# Altium PCB PCB1.PcbDoc (part 1 of 2)
Units mil, origin at the board's own origin, x right, y up, seen from the top; angles counter-clockwise.
Board outline 3035 x 2265 mil, 2 copper layers (Top Layer, Bottom Layer); 66 components, 70 nets, 274 pads, 24 vias.
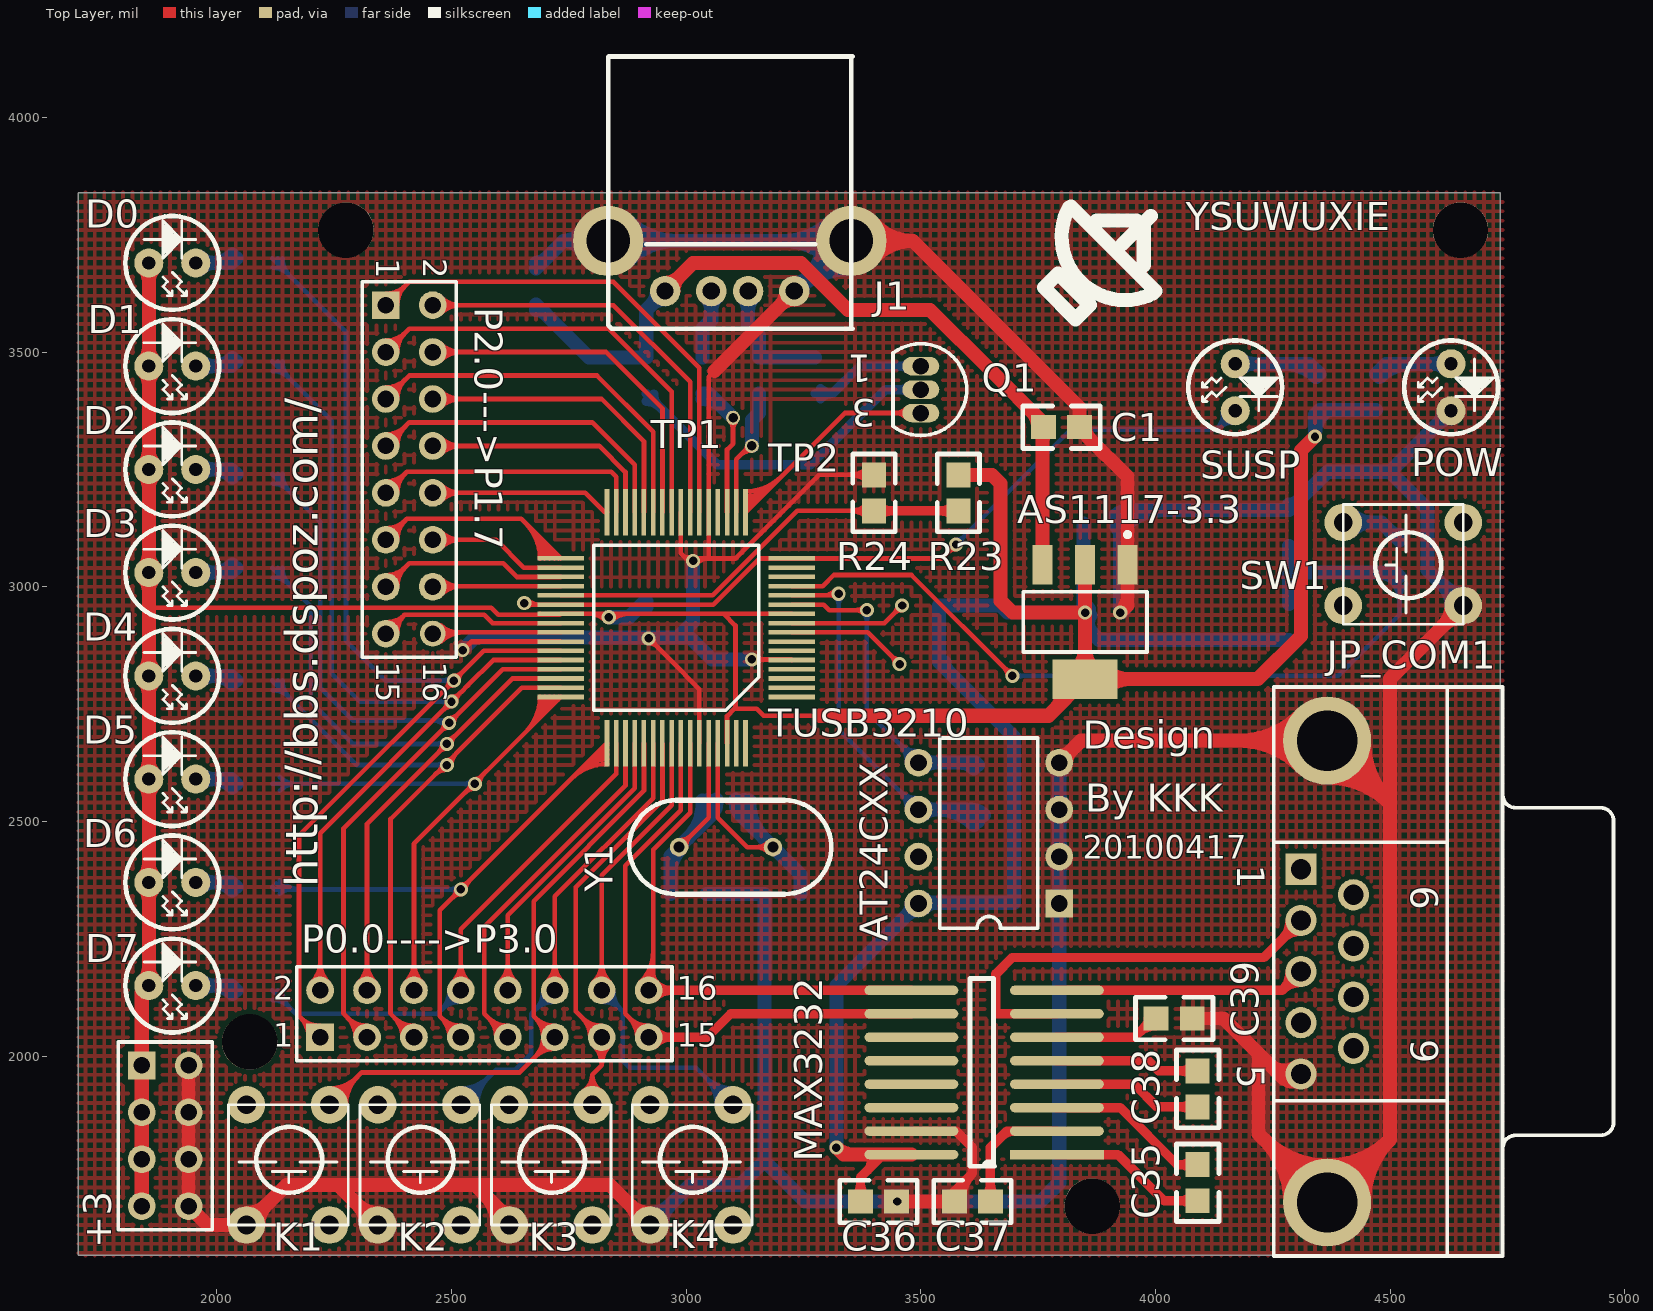
[diagram p0: Top Layer view]
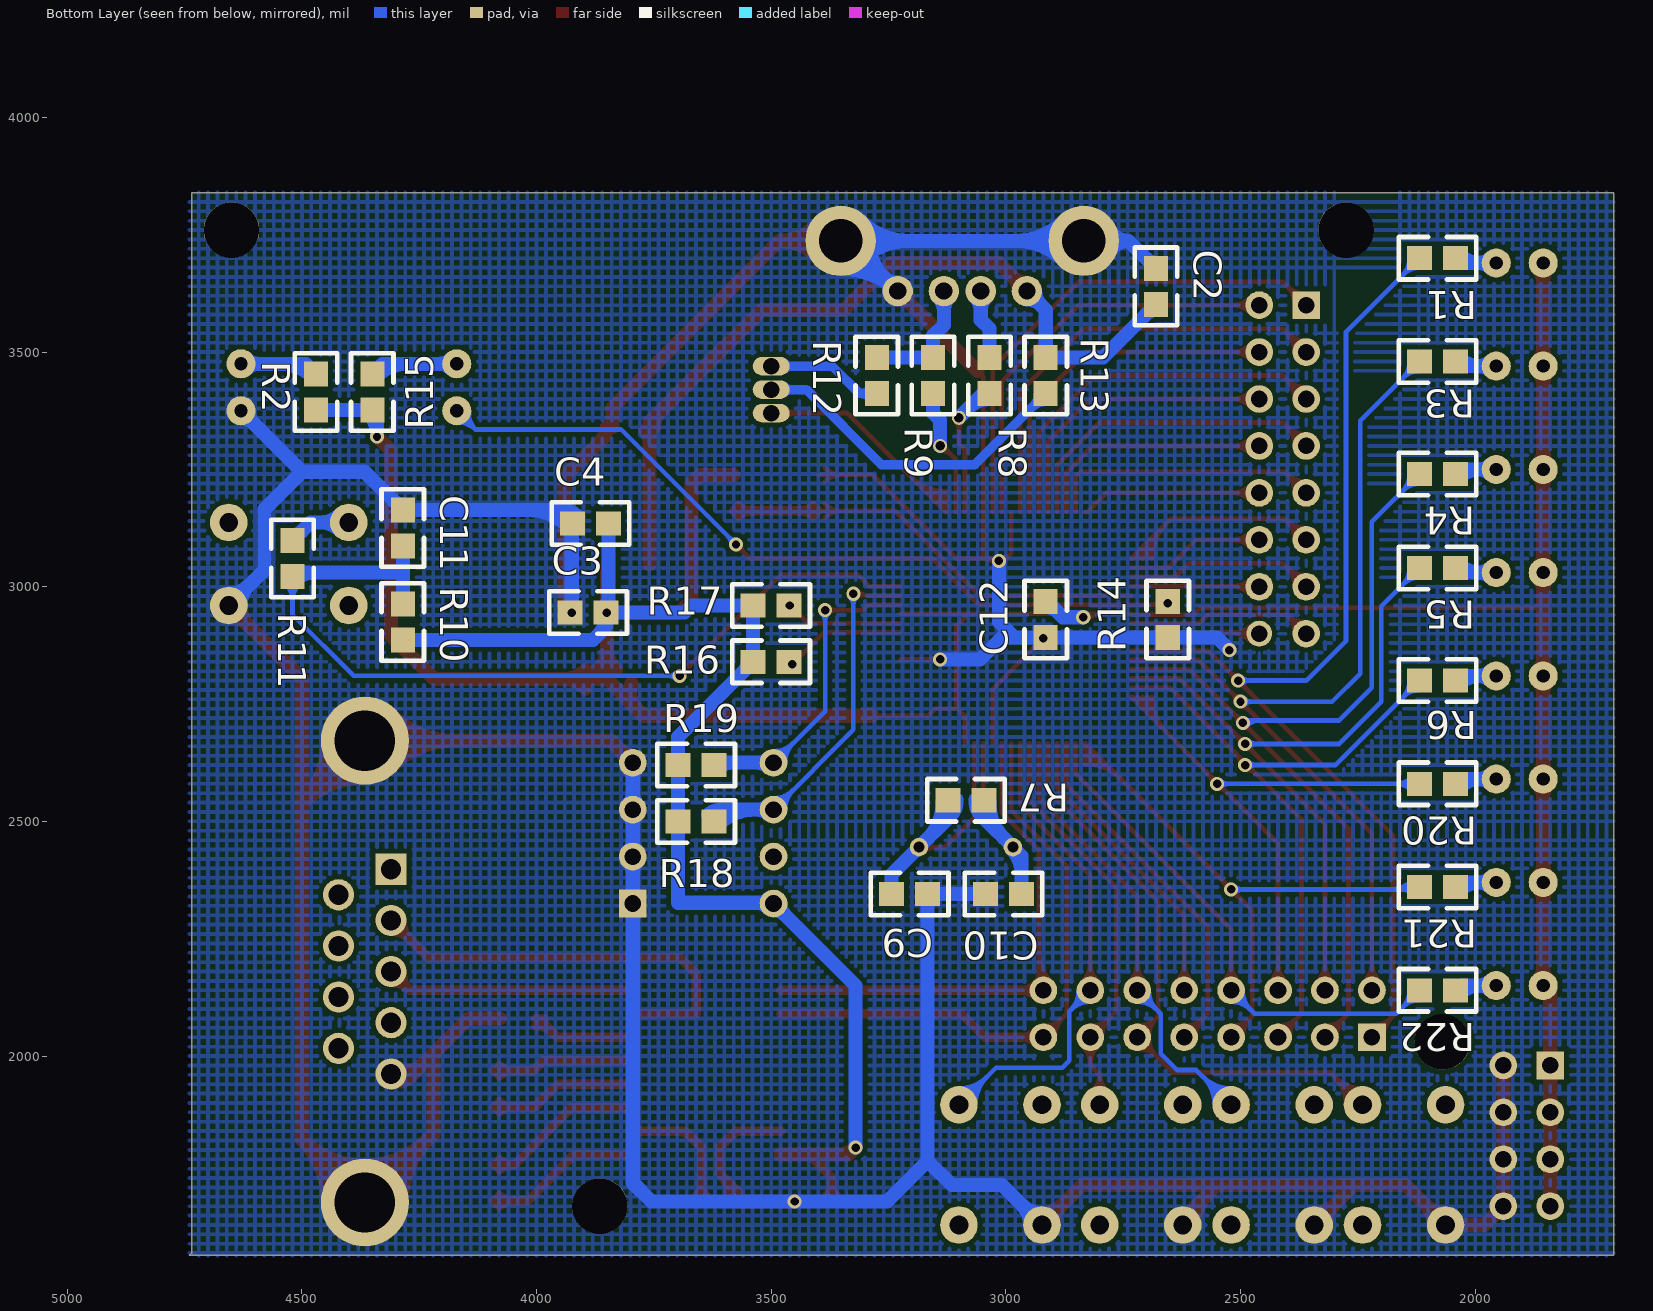
[diagram p1: Bottom Layer view, seen from below]

## Layer stack, top to bottom
Top Layer: signal copper 1.4
Dielectric: dielectric 12.6, FR-4, Dk 4.8
Bottom Layer: signal copper 1.4

## Board outline
1705,3840 1705,1575 4740,1575 4735,1580 4735,3840

## Design rules (kind name [scope] priority, off if disabled: settings)
Clearance [All] p1: gap=5
HoleSize [All] p1: absolutevalues=TRUE maxlimit=300 minlimit=1 maxpercent=80.000 minpercent=20.000
PolygonConnect [All] p1: connectstyle=Direct reliefconductorwidth=10 reliefentries=4 polygonreliefangle="90 Angle"
RoutingVias [All] p1: holewidth=18 width=30 viastyle="Through Hole" minholewidth=18 minwidth=30 maxholewidth=18 maxwidth=30
SilkscreenOverComponentPads [All] p1: minsilkscreentomaskgap=10
SolderMaskExpansion [All] p1: expansion=4
TestPointUsage [All] p1: valid=0 allowmultiple=FALSE
Testpoint [All] p1: side=15 testpointundercomponent=TRUE minsize=40 maxsize=100 preferedsize=60 minholesize=0 maxholesize=40 preferedholesize=32 testpointgrid=1 style=1023 order=0123456789
Width [All] p1: maxlimit=50 minlimit=5 preferedwidth=50
22 further rules are at their usual default settings.

## Components (designator, comment, footprint, x,y, rotation, side; value= is the part's Value field where it differs from the comment)
+3 "Header 4X2" HDR2X4 1840,1980 r270 top (schematic designator "+3.3  GND")
AS1117-3.3 "AS1117-3.3" DSO-G3 3850,2925 r180 top
AT24CXX "24LCxx" DIP-8 3645,2475 r90 top (schematic designator U5)
C1 "Cap" C0805 3800,3340 r180 top
C2 "Cap" C0805 2680,3640 r270 bottom
C3 "Cap" C0805 3890,2945 r180 bottom
C4 "Cap" C0805 3885,3135 r180 bottom
C9 "Cap" C0805 3205,2345 r180 bottom
C10 "Cap" C0805 3005,2345 r0 bottom
C11 "Cap" C0805 4285,3125 r90 bottom
C12 "Cap" C0805 2915,2930 r90 bottom
C35 "Cap" C0805 4090,1730 r90 top
C36 "Cap" C0805 3410,1690 r0 top
C37 "Cap" C0805 3610,1690 r0 top
C38 "Cap" C0805 4090,1930 r90 top
C39 "Cap" C0805 4040,2080 r180 top
D0 "LED1" LED 1855,3690 r0 top
D1 "LED1" LED 1855,3470 r0 top
D2 "LED1" LED 1855,3250 r0 top
D3 "LED1" LED 1855,3030 r0 top
D4 "LED1" LED 1855,2810 r0 top
D5 "LED1" LED 1855,2590 r0 top
D6 "LED1" LED 1855,2370 r0 top
D7 "LED1" LED 1855,2150 r0 top
J1 "USB_A" USB-A 2955,3630 r180 top
JP_COM1 "D Connector 9" DSUB1.385-2H9 4740,2180 r270 top
K1 "Button" SW-6 2240,1640 r90 top
K2 "Button" SW-6 2520,1640 r90 top
K3 "Button" SW-6 2800,1640 r90 top
K4 "Button" SW-6 3100,1640 r90 top
MAX3232 "MAX3232" SOP16 3770,1790 r180 top (schematic designator U6)
P0.0---->P3.0 "Header 8X2" HDR2X8#1 2220,2040 r0 top (schematic designator P1)
P2.0--->P1.7 "Header 8X2" HDR2X8#2 2360,3600 r270 top (schematic designator P2)
POW "LED1" LED 4630,3475 r270 top
Q1 "2N3904" TO-92A 3500,3420 r180 top
R1 "Res2" c0805 2080,3700 r180 bottom
R2 "Res2" c0805 4470,3415 r90 bottom
R3 "Res2" c0805 2080,3480 r180 bottom
R4 "Res2" c0805 2080,3240 r180 bottom
R5 "Res2" c0805 2080,3040 r180 bottom
R6 "Res2" c0805 2080,2800 r180 bottom
R7 "Res2" c0805 3085,2545 r180 bottom
R8 "Res2" c0805 3035,3450 r270 bottom
R9 "Res2" c0805 3155,3450 r270 bottom
R10 "Res2" c0805 4285,2925 r270 bottom
R11 "Res2" c0805 4520,3060 r270 bottom
R12 "Res2" c0805 3275,3450 r90 bottom
R13 "Res2" c0805 2915,3450 r90 bottom
R14 "Res2" c0805 2655,2930 r270 bottom
R15 "Res2" c0805 4350,3415 r90 bottom
R16 "Res2" c0805 3500,2840 r180 bottom
R17 "Res2" c0805 3500,2960 r180 bottom
R18 "Res2" c0805 3660,2500 r0 bottom
R19 "Res2" c0805 3660,2620 r0 bottom
R20 "Res2" c0805 2080,2580 r180 bottom
R21 "Res2" c0805 2080,2360 r180 bottom
R22 "Res2" c0805 2080,2140 r180 bottom
R23 "Res2" c0805 3580,3200 r90 top
R24 "Res2" c0805 3400,3200 r270 top
SUSP "LED1" LED 4170,3475 r270 top
SW1 "Button" SW-6 4400,2960 r0 top
TP1 "TestPoint" TESTPOINT 3100,3360 r90 top
TP2 "TestPoint" TESTPOINT 3140,3300 r90 top
TUSB3210 "TUSB3210" Quad64 3225,2765 r180 top (schematic designator U3)
Y1 "XTAL" GJA-M 3085,2445 r180 top
? "Comment" WXDAHZ 3880,3680 r0 top

## Footprints (in the part's own frame and the unit in brackets; to place one, negate y for a bottom-side part, rotate by r counter-clockwise, add the part's x,y. Pads: shape width x height; smd on the part's side, far side on the other; paste and mask are expansions set on the pad)
C0805 [mm]
  rect 1.35x1.3 smd: 1(-0.975,0) 2(0.975,0)
  silkscreen extent -2.1,-1.15 2.1,1.15
c0805 [mm]
  rect 1.35x1.3 smd: 1(-0.975,0) 2(0.975,0)
  silkscreen extent -2.1,-1.15 2.1,1.15
DIP-8 [mm] "DIP; 8 Leads; Row Spacing 7.62 mm; Pitch 2.54 mm"
  rect 1.5x1.5 hole 0.9: 1(-3.81,-3.81)
  round 1.5 hole 0.9: 2(-1.27,-3.81) 3(1.27,-3.81) 4(3.81,-3.81) 5(3.81,3.81) 6(1.27,3.81) 7(-1.27,3.81) 8(-3.81,3.81)
  silkscreen extent -5.15,-2.65 5.15,2.65
DSO-G3 [mm]
  rect 1.1x2.15 smd: 1(-2.3,-3.1) 2(0,-3.1) 3(2.3,-3.1)
  rect 3.5x2.15 smd: 4(0,3.1)
  silkscreen extent -3.35,-4.85 3.35,1.63
DSUB1.385-2H9 [mm] "Connector; D Subminiature; 9 Position; Right Angle; Pitch 1.385 mm"
  rect 1.69x1.69 hole 1.09: 1(-5.54,-10.92)
  round 1.69 hole 1.09: 2(-2.77,-10.92) 3(0,-10.92) 4(2.77,-10.92) 5(5.54,-10.92) 6(-4.155,-8.08) 7(-1.385,-8.08) 8(1.385,-8.08) 9(4.155,-8.08)
  round 4.76 hole 3.26: 10(-12.495,-9.5) 11(12.495,-9.5)
  silkscreen extent -15.4,-12.4 15.4,6
GJA-M [mm]
  round 1 hole 0.6: 1(-2.54,0) 2(2.54,0)
  silkscreen extent -5.69,-2.54 5.23,2.54
HDR2X4 [mm] "Connector; Header; 4x2 Position"
  rect 1.5x1.5 hole 0.9: 1(0,0)
  round 1.5 hole 0.9: 2(0,2.54) 3(2.54,0) 4(2.54,2.54) 5(5.08,0) 6(5.08,2.54) 7(7.62,0) 8(7.62,2.54)
  silkscreen extent -1.27,-1.27 8.89,3.81
HDR2X8#1 [mm] "Connector; Header; 8x2 Position"
  rect 1.5x1.5 hole 0.9: 1(0,0)
  round 1.5 hole 0.9: 2(0,2.54) 3(2.54,0) 4(2.54,2.54) 5(5.08,0) 6(5.08,2.54) 7(7.62,0) 8(7.62,2.54) 9(10.16,0) 10(10.16,2.54) 11(12.7,0) 12(12.7,2.54) 13(15.24,0) 14(15.24,2.54) 15(17.78,0) 16(17.78,2.54)
  silkscreen extent -1.27,-1.27 19.05,3.81
HDR2X8#2 [mm] "Connector; Header; 8x2 Position"
  rect 1.5x1.5 hole 0.9: 1(0,0)
  round 1.5 hole 0.9: 2(0,2.54) 3(2.54,0) 4(2.54,2.54) 5(5.08,0) 6(5.08,2.54) 7(7.62,0) 8(7.62,2.54) 9(10.16,0) 10(10.16,2.54) 11(12.7,0) 12(12.7,2.54) 13(15.24,0) 14(15.24,2.54) 15(17.78,0)
  round 1.397 hole 0.9: 16(17.78,2.54)
  silkscreen extent -1.27,-1.27 19.05,3.81
LED [mil]
  round 62 hole 28: 1(0,0) 2(100,0)
  silkscreen extent -50,-100 150,100
Quad64 [mm]
  rect 2.5x0.25 smd: 1(0,0) 2(0,-0.5) 3(0,-1) 4(0,-1.5) 5(0,-2) 6(0,-2.5) 7(0,-3) 8(0,-3.5) 9(0,-4) 10(0,-4.5) 11(0,-5) 12(0,-5.5) 13(0,-6) 14(0,-6.5) 15(0,-7) 16(0,-7.5) 33(12.5,-7.5) 34(12.5,-7) 35(12.5,-6.5) 36(12.5,-6) 37(12.5,-5.5) 38(12.5,-5) 39(12.5,-4.5) 40(12.5,-4) 41(12.5,-3.5) 42(12.5,-3) 43(12.5,-2.5) 44(12.5,-2) 45(12.5,-1.5) 46(12.5,-1) 47(12.5,-0.5) 48(12.5,0)
  rect 0.25x2.5 smd: 17(2.5,-10) 18(3,-10) 19(3.5,-10) 20(4,-10) 21(4.5,-10) 22(5,-10) 23(5.5,-10) 24(6,-10) 25(6.5,-10) 26(7,-10) 27(7.5,-10) 28(8,-10) 29(8.5,-10) 30(9,-10) 31(9.5,-10) 32(10,-10) 49(10,2.5) 50(9.5,2.5) 51(9,2.5) 52(8.5,2.5) 53(8,2.5) 54(7.5,2.5) 55(7,2.5) 56(6.5,2.5) 57(6,2.5) 58(5.5,2.5) 59(5,2.5) 60(4.5,2.5) 61(4,2.5) 62(3.5,2.5) 63(3,2.5) 64(2.5,2.5)
  silkscreen extent 1.79,-8.21 10.71,0.71
SOP16 [mil]
  rect 200x20 smd: 1(-20,0)
  oval 200x20 smd: 2(-20,-50) 3(-20,-100) 4(-20,-150) 5(-20,-200) 6(-20,-250) 7(-20,-300) 8(-20,-350) 9(290,-350) 10(290,-300) 11(290,-250) 12(290,-200) 13(290,-150) 14(290,-100) 15(290,-50) 16(290,0)
  silkscreen extent 112,-375 165,25
SW-6 [mil]
  round 80 hole 40: 1(0,0) 2(0,177) 3(256,0) 4(256,177)
  silkscreen extent 0,-40 256,215
TESTPOINT [mil]
  round 30 hole 20: 1(0,0)
TO-92A [mm] "TO, Flat Index; 3 In-Line, Axial Leads; Body Dia. 4.5mm; Leads 0.51 x 0.48 mm (max)"
  oval 2x1 hole 0.9: 1(0,-1.27) 2(0,0) 3(0,1.27)
  silkscreen extent -2.48,-2.48 1.5,2.48
USB-A [mil]
  round 65 hole 37: 1(0,0) 2(-98.5,0) 3(-177,0) 4(-275.6,0)
  round 150 hole 93: 5(121,-107) 6(-397,-107)
  silkscreen extent -400,-500 121,80
WXDAHZ [mil]
  silkscreen extent -118,-110 120,130

## Part data
+3: "Header, 4-Pin, Dual row"
C1 C2 C3 C4 C9 C10 C11 C12 C35 C36 C37 C38 C39: "Capacitor"
D0 D1 D2 D3 D4 D5 D6 D7 POW SUSP: "Typical RED GaAs LED"
JP_COM1: "Receptacle Assembly, 9 Position, Right Angle"
K1 K2 K3 K4 SW1: library part Button_4
P0.0---->P3.0 P2.0--->P1.7: "Header, 8-Pin, Dual row"
Q1: "NPN General Purpose Amplifier"
R1 R2 R3 R4 R5 R6 R7 R8 R9 R10 R11 R12 R13 R14 R15 R16 R17 R18 R19 R20 R21 R22 R23 R24: "Resistor"
TP1 TP2: "TespPoint"
Y1: "Crystal Oscillator"

## Free pads (board coordinates)
  round 118.11 hole 118.11: 0(2070,2030) 0(3865,1680) 1(4650,3760) 2(2275,3760)

## Via types
v1: diameter 30, hole 18, Top Layer to Bottom Layer, 24 vias

## Nets (pads, with @x,y where several pads share a name; then routed paths per layer and width w, separated by ;. In a path a pad name is that pad's centre, name@x,y a point inside that pad or via, vN(x,y) a via of type N, cw(c..) or ccw(c..) an arc to the next point about the centre after c; other vN are vias at no path point)
+1.8: R23.1 R24.2 TUSB3210.37 | length 1118
  Top Layer w10: TUSB3210.37@2732.87,2981.53 3056.53,2981.53 3236.61,3161.61 R24.2@3400,3161.61 ; R24.2@3385.44,3147.05 ccw(c3350.29,3111.9) 3350.29,3161.61 ccw(c3350.29,3211.32) R24.2@3385.44,3176.17
  Top Layer w20: R24.2@3400,3161.61 R23.1@3580,3161.61 ; R24.2@3411.02,3150.59 cw(c3437.64,3123.98) 3437.64,3161.61 cw(c3437.64,3199.25) R24.2@3411.02,3172.64 ; R23.1@3568.98,3150.59 ccw(c3542.36,3123.98) 3542.36,3161.61 ccw(c3542.36,3199.25) R23.1@3568.98,3172.64
+3.3: +3.1 +3.3 +3.5 +3.7 AS1117-3.3.2 AS1117-3.3.4 AT24CXX.8 C3.2 C4.2 C12.2 C36.1 D0.1 D1.1 D2.1 D3.1 D4.1 D5.1 D6.1 D7.1 MAX3232.16 R2.1 R10.2 R15.1 R16.1 R17.1 R18.2 R19.2 R23.2 TUSB3210.10 TUSB3210.39 TUSB3210.62 | length 12761.5
  Top Layer w10: 1855,2955 2585,2955 2600,2940 2730.71,2940 TUSB3210.39@2732.87,2942.16 3080,2942.16 ; 2683.55,2940 ccw(c2683.55,2947.2) TUSB3210.39@2688.64,2942.11 ; 2793.56,2942.16 cw(c2793.56,2893.56) v1@2827.93,2927.93 ; 2817.7,2942.16 cw(c2817.7,2917.7) v1(2835,2935) cw(c2852.3,2917.7) 2852.3,2942.16 ; v1@2842.07,2927.93 cw(c2876.44,2893.56) 2876.44,2942.16 ; TUSB3210.62@3087.2,2666.57 3087.2,2724.41 3102.8,2740 3105,2740 ; TUSB3210.10@3225,2942.16 3080,2942.16 ; 3285,2725 3165,2725 3150,2740 3105,2740 ; 3080,2942.16 3105,2917.16 3105,2740
  Top Layer w20: C36.1@3371.61,1690 3371.61,1741.61 3420,1790 MAX3232.16@3480,1790 ; 3371.61,1727.64 cw(c3333.98,1727.64) 3360.59,1701.02 ccw(c3333.98,1727.64) 3371.61,1727.64 ; 3371.61,1727.64 ccw(c3409.25,1727.64) 3382.64,1701.02 cw(c3409.25,1727.64) 3371.61,1727.64 ; 3386.61,1756.61 ccw(c3367.85,1775.38) 3390,1790 cw(c3367.85,1775.38) 3386.61,1756.61
  Top Layer w30: +3.7@1840,1680 +3.5@1840,1780 +3.3@1840,1880 +3.1@1840,1980 1840,2135 D7.1@1855,2150 D6.1@1855,2370 D5.1@1855,2590 D4.1@1855,2810 1855,2955 D3.1@1855,3030 D2.1@1855,3250 D1.1@1855,3470 D0.1@1855,3690 ; 3285,2725 3772.05,2725 AS1117-3.3.4@3850,2802.95 ; 3356.21,1790 cw(c3356.21,1841.21) v1(3320,1805) 3335,1790 MAX3232.16@3480,1790 ; R23.2@3580,3238.39 3651.61,3238.39 3670,3220 3670,2970 3695,2945 v1(3850,2945) ; 3785.34,2738.29 ccw(c3747.88,2775.75) AS1117-3.3.4@3797.72,2793.7 ; AS1117-3.3.4@3830.68,2822.27 ccw(c3784.04,2868.92) 3850,2868.92 ccw(c3915.96,2868.92) AS1117-3.3.4@3869.32,2822.27 ; AS1117-3.3.2@3850,3047.05 v1(3850,2945) ; AS1117-3.3.4@3895.89,2783.63 cw(c3942.54,2736.99) 3942.54,2802.95 cw(c3942.54,2868.92) AS1117-3.3.4@3895.89,2822.27 ; v1(4340,3320) 4310,3290 4310,2895 4217.95,2802.95 AS1117-3.3.4@3850,2802.95 ; D7.1@1843.69,2161.31 ccw(c1816.37,2188.63) 1855,2188.63 ; D7.1@1843.69,2161.31 ccw(c1816.37,2188.63) 1855,2188.63 ; D7.1@1843.69,2161.31 ccw(c1816.37,2188.63) 1855,2188.63 ; D6.1@1843.69,2358.69 cw(c1816.37,2331.37) 1855,2331.37 ; D6.1@1843.69,2358.69 cw(c1816.37,2331.37) 1855,2331.37 ; D6.1@1843.69,2358.69 cw(c1816.37,2331.37) 1855,2331.37 ; D6.1@1843.69,2381.31 ccw(c1816.37,2408.63) 1855,2408.63 ; D6.1@1843.69,2381.31 ccw(c1816.37,2408.63) 1855,2408.63 ; D6.1@1843.69,2381.31 ccw(c1816.37,2408.63) 1855,2408.63 ; D5.1@1843.69,2578.69 cw(c1816.37,2551.37) 1855,2551.37 ; D5.1@1843.69,2578.69 cw(c1816.37,2551.37) 1855,2551.37 ; D5.1@1843.69,2578.69 cw(c1816.37,2551.37) 1855,2551.37 ; D5.1@1843.69,2601.31 ccw(c1816.37,2628.63) 1855,2628.63 ; D5.1@1843.69,2601.31 ccw(c1816.37,2628.63) 1855,2628.63 ; D5.1@1843.69,2601.31 ccw(c1816.37,2628.63) 1855,2628.63 ; D4.1@1843.69,2798.69 cw(c1816.37,2771.37) 1855,2771.37 ; D4.1@1843.69,2798.69 cw(c1816.37,2771.37) 1855,2771.37 ; D4.1@1843.69,2798.69 cw(c1816.37,2771.37) 1855,2771.37 ; D4.1@1843.69,2821.31 ccw(c1816.37,2848.63) 1855,2848.63 ; D4.1@1843.69,2821.31 ccw(c1816.37,2848.63) 1855,2848.63 ; D4.1@1843.69,2821.31 ccw(c1816.37,2848.63) 1855,2848.63 ; D3.1@1843.69,3018.69 cw(c1816.37,2991.37) 1855,2991.37 ; D3.1@1843.69,3018.69 cw(c1816.37,2991.37) 1855,2991.37 ; D3.1@1843.69,3018.69 cw(c1816.37,2991.37) 1855,2991.37 ; D3.1@1843.69,3041.31 ccw(c1816.37,3068.63) 1855,3068.63 ; D3.1@1843.69,3041.31 ccw(c1816.37,3068.63) 1855,3068.63 ; D3.1@1843.69,3041.31 ccw(c1816.37,3068.63) 1855,3068.63 ; D2.1@1843.69,3238.69 cw(c1816.37,3211.37) 1855,3211.37 ; D2.1@1843.69,3238.69 cw(c1816.37,3211.37) 1855,3211.37 ; D2.1@1843.69,3238.69 cw(c1816.37,3211.37) 1855,3211.37 ; D2.1@1843.69,3261.31 ccw(c1816.37,3288.63) 1855,3288.63 ; D2.1@1843.69,3261.31 ccw(c1816.37,3288.63) 1855,3288.63 ; D2.1@1843.69,3261.31 ccw(c1816.37,3288.63) 1855,3288.63 ; D1.1@1843.69,3458.69 cw(c1816.37,3431.37) 1855,3431.37 ; D1.1@1843.69,3458.69 cw(c1816.37,3431.37) 1855,3431.37 ; D1.1@1843.69,3458.69 cw(c1816.37,3431.37) 1855,3431.37 ; D1.1@1843.69,3481.31 ccw(c1816.37,3508.63) 1855,3508.63 ; D1.1@1843.69,3481.31 ccw(c1816.37,3508.63) 1855,3508.63 ; D1.1@1843.69,3481.31 ccw(c1816.37,3508.63) 1855,3508.63 ; D0.1@1843.69,3678.69 cw(c1816.37,3651.37) 1855,3651.37 ; D0.1@1843.69,3678.69 cw(c1816.37,3651.37) 1855,3651.37 ; D0.1@1843.69,3678.69 cw(c1816.37,3651.37) 1855,3651.37 ; 1855,2188.63 ccw(c1893.63,2188.63) D7.1@1866.31,2161.31 ; 1855,2188.63 ccw(c1893.63,2188.63) D7.1@1866.31,2161.31 ; 1855,2188.63 ccw(c1893.63,2188.63) D7.1@1866.31,2161.31 ; 1855,2331.37 cw(c1893.63,2331.37) D6.1@1866.31,2358.69 ; 1855,2331.37 cw(c1893.63,2331.37) D6.1@1866.31,2358.69 ; 1855,2331.37 cw(c1893.63,2331.37) D6.1@1866.31,2358.69 ; 1855,2408.63 ccw(c1893.63,2408.63) D6.1@1866.31,2381.31 ; 1855,2408.63 ccw(c1893.63,2408.63) D6.1@1866.31,2381.31 ; 1855,2408.63 ccw(c1893.63,2408.63) D6.1@1866.31,2381.31 ; 1855,2551.37 cw(c1893.63,2551.37) D5.1@1866.31,2578.69 ; 1855,2551.37 cw(c1893.63,2551.37) D5.1@1866.31,2578.69 ; 1855,2551.37 cw(c1893.63,2551.37) D5.1@1866.31,2578.69 ; 1855,2628.63 ccw(c1893.63,2628.63) D5.1@1866.31,2601.31 ; 1855,2628.63 ccw(c1893.63,2628.63) D5.1@1866.31,2601.31 ; 1855,2628.63 ccw(c1893.63,2628.63) D5.1@1866.31,2601.31 ; 1855,2771.37 cw(c1893.63,2771.37) D4.1@1866.31,2798.69 ; 1855,2771.37 cw(c1893.63,2771.37) D4.1@1866.31,2798.69 ; 1855,2771.37 cw(c1893.63,2771.37) D4.1@1866.31,2798.69 ; 1855,2848.63 ccw(c1893.63,2848.63) D4.1@1866.31,2821.31 ; 1855,2848.63 ccw(c1893.63,2848.63) D4.1@1866.31,2821.31 ; 1855,2848.63 ccw(c1893.63,2848.63) D4.1@1866.31,2821.31 ; 1855,2991.37 cw(c1893.63,2991.37) D3.1@1866.31,3018.69 ; 1855,2991.37 cw(c1893.63,2991.37) D3.1@1866.31,3018.69 ; 1855,2991.37 cw(c1893.63,2991.37) D3.1@1866.31,3018.69 ; 1855,3068.63 ccw(c1893.63,3068.63) D3.1@1866.31,3041.31 ; 1855,3068.63 ccw(c1893.63,3068.63) D3.1@1866.31,3041.31 ; 1855,3068.63 ccw(c1893.63,3068.63) D3.1@1866.31,3041.31 ; 1855,3211.37 cw(c1893.63,3211.37) D2.1@1866.31,3238.69 ; 1855,3211.37 cw(c1893.63,3211.37) D2.1@1866.31,3238.69 ; 1855,3211.37 cw(c1893.63,3211.37) D2.1@1866.31,3238.69 ; 1855,3288.63 ccw(c1893.63,3288.63) D2.1@1866.31,3261.31 ; 1855,3288.63 ccw(c1893.63,3288.63) D2.1@1866.31,3261.31 ; 1855,3288.63 ccw(c1893.63,3288.63) D2.1@1866.31,3261.31 ; 1855,3431.37 cw(c1893.63,3431.37) D1.1@1866.31,3458.69 ; 1855,3431.37 cw(c1893.63,3431.37) D1.1@1866.31,3458.69 ; 1855,3431.37 cw(c1893.63,3431.37) D1.1@1866.31,3458.69 ; 1855,3508.63 ccw(c1893.63,3508.63) D1.1@1866.31,3481.31 ; 1855,3508.63 ccw(c1893.63,3508.63) D1.1@1866.31,3481.31 ; 1855,3508.63 ccw(c1893.63,3508.63) D1.1@1866.31,3481.31 ; 1855,3651.37 cw(c1893.63,3651.37) D0.1@1866.31,3678.69 ; 1855,3651.37 cw(c1893.63,3651.37) D0.1@1866.31,3678.69 ; 1855,3651.37 cw(c1893.63,3651.37) D0.1@1866.31,3678.69 ; AS1117-3.3.4@3850,2802.95 v1(3850,2945)
  Bottom Layer w30: v1(2835,2935) 2877.94,2935 2911.32,2968.39 C12.2@2915,2968.39 ; 2888.96,2946.03 cw(c2915,2919.99) C12.2@2915,2956.81 ; v1(3320,1805) 3320,2150 AT24CXX.8@3495,2325 3496.61,2326.61 3698.39,2326.61 R18.2@3698.39,2500 R19.2@3698.39,2620 3698.39,2680 R16.1@3538.39,2840 R17.1@3538.39,2960 3670,2960 3685,2945 v1(3850,2945) C3.2@3851.61,2945 ; AT24CXX.8@3480.47,2325 cw(c3445.4,2325) 3470.2,2300.2 cw(c3495,2275.4) AT24CXX.8@3495,2310.47 ; AT24CXX.8@3505.27,2314.73 cw(c3533.97,2286.03) 3533.97,2326.61 ; AT24CXX.8@3505.27,2335.27 ccw(c3526.18,2356.18) 3526.18,2326.61 ; R16.1@3549.96,2840 ccw(c3577.91,2840) R16.1@3558.15,2820.24 ; 3846.61,2980.26 ccw(c3885.89,2980.26) C3.2@3858.12,2952.49 ; C4.2@3846.61,3135 3846.61,2950 C3.2@3851.61,2945 ; 3851.61,2917.06 cw(c3880.54,2917.06) C3.2@3860.09,2937.51 ; C3.2@3861.28,2938.93 ccw(c3884.84,2922.44) 3864.51,2902.11 ; R10.2@4285,2886.61 3880,2886.61 3851.61,2915 C3.2@3851.61,2945 ; v1(4340,3320) 4340,3366.61 R15.1@4350,3376.61 R2.1@4470,3376.61 ; v1@4340,3325.92 cw(c4399.71,3325.92) R15.1@4357.49,3368.14
GND: +3.2 +3.4 +3.6 +3.8 AS1117-3.3.1 AT24CXX.1 AT24CXX.2 AT24CXX.3 AT24CXX.4 C1.1 C2.1 C3.1 C4.1 C9.2 C10.2 C11.2 C12.1 C36.2 C37.1 C39.1 J1.4 J1.5 J1.6 JP_COM1.5 JP_COM1.10 JP_COM1.11 K1.2 K2.2 K3.2 K4.2 MAX3232.15 pad.0@3865,1680 pad.1 pad.2 POW.2 R14.2 R24.1 SW1.3 TUSB3210.5 TUSB3210.21 TUSB3210.24 TUSB3210.42 TUSB3210.59 | length 22373
  Top Layer w10: v1(2523.78,2865) 2541.89,2883.11 TUSB3210.42@2732.87,2883.11 ; v1@2920,2880 cw(c2920,2855.86) 2937.07,2872.93 cw(c2954.14,2890) v1@2930,2890 ; v1(2920,2890) 2965,2845 3028.15,2781.85 TUSB3210.59@3028.15,2666.57 ; TUSB3210.24@2988.78,3158.7 2988.78,3071.22 3000,3060 3045,3060 ; 2993.78,3066.22 ccw(c3003.64,3076.08) v1@3010.26,3063.8 ; v1@3023,3049 cw(c3045,3032.5) 3045,3060 ; 3060,3459.4 3047.83,3447.24 TUSB3210.21@3047.83,3158.7 3047.83,3062.83 3045,3060 ; v1(3140,2845) 3223.74,2845 TUSB3210.5@3225,2843.74 ; v1@3147.07,2837.93 cw(c3164.14,2820.86) 3164.14,2845 cw(c3164.14,2869.14) v1@3147.07,2852.07 ; R24.1@3385.44,3223.83 ccw(c3350.29,3188.68) 3350.29,3238.39 ccw(c3350.29,3288.1) R24.1@3385.44,3252.95 ; R24.1@3400,3238.39 3283.39,3238.39 3105,3060 3045,3060
  Top Layer w20: MAX3232.15@3480,1840 3575,1840 3610,1805 3610,1750 ; C37.1@3571.61,1690 3571.61,1711.61 3610,1750 ; 3610,1750 ccw(c3663.25,1696.74) 3588.15,1691.16 cw(c3663.25,1696.74) 3610,1750 ; C37.1@3568.2,1689.67 cw(c3605.82,1692.47) 3579.15,1719.15 ccw(c3605.82,1692.47) C37.1@3568.2,1689.67
  Top Layer w30: +3.2@1940,1980 +3.4@1940,1880 +3.6@1940,1780 +3.8@1940,1680 1980,1640 K1.2@2063,1640 2148,1725 2258,1725 ; K2.2@2343,1640 2258,1725 ; K3.2@2623,1640 2623,1652 2550,1725 ; K4.2@2923,1640 2838,1725 2550,1725 ; 3060,3459.4 J1.4@3230.6,3630 ; J1.6@3352,3737 3483,3737 ; J1.6@3397.43,3697.81 cw(c3482.99,3624) 3482.99,3737 ; J1.6@3397.43,3776.19 ccw(c3482.99,3850) 3482.99,3737 ; C36.2@3448.39,1690 C37.1@3571.61,1690 ; AT24CXX.4@3795,2625 3841.93,2671.93 JP_COM1.10@4365.98,2671.93 4500,2537.91 ; AT24CXX.4@3795,2639.53 ccw(c3795,2674.6) 3819.8,2649.8 ccw(c3844.6,2625) AT24CXX.4@3809.53,2625 ; C1.1@3838.39,3340 3838.39,3381.61 3483,3737 ; C1.1@3849.96,3340 ccw(c3886.08,3340) C1.1@3860.54,3314.46 ; C1.1@3856.69,3318.31 3940.55,3234.45 AS1117-3.3.1@3940.55,3047.05 3940.55,2960.55 v1(3925,2945) ccw(c3887.46,2982.54) 3940.55,2982.54 ; C39.1@4078.39,2080 4145,2080 4220,2005 ; JP_COM1.5@4310.08,1961.89 4263.11,1961.89 4220,2005 ; JP_COM1.10@4310.33,2616.28 ccw(c4175.98,2481.93) 4175.98,2671.93 ccw(c4175.98,2861.93) JP_COM1.10@4310.33,2727.58 ; JP_COM1.10@4331.55,2637.49 ccw(c4248.41,2554.36) 4248.41,2671.93 ccw(c4248.41,2789.5) JP_COM1.10@4331.55,2706.37 ; SW1.3@4631,2960 cw(c4570.64,2960) 4613.32,2917.32 cw(c4656,2874.64) SW1.3@4656,2935 ; SW1.3@4656,2960 4500,2804 4500,2537.91 ; 2105.68,1682.68 cw(c2063,1725.36) 2063,1665 ccw(c2063,1725.36) 2105.68,1682.68 ; 2105.68,1682.68 ccw(c2148.36,1640) 2088,1640 cw(c2148.36,1640) 2105.68,1682.68 ; 2258,1725 2550,1725 ; 2300.32,1682.68 cw(c2257.64,1640) 2318,1640 ccw(c2257.64,1640) 2300.32,1682.68 ; 2300.32,1682.68 ccw(c2343,1725.36) 2343,1665 cw(c2343,1725.36) 2300.32,1682.68 ; 2880.32,1682.68 cw(c2837.64,1640) 2898,1640 ccw(c2837.64,1640) 2880.32,1682.68 ; 2880.32,1682.68 ccw(c2923,1725.36) 2923,1665 cw(c2923,1725.36) 2880.32,1682.68 ; 3200.72,3600.13 cw(c3230.6,3570.25) J1.4@3230.6,3612.5 ; 3200.72,3600.13 ccw(c3170.85,3630) J1.4@3213.1,3630 ; 3200.72,3600.13 cw(c3230.6,3570.25) J1.4@3230.6,3612.5 ; 3200.72,3600.13 ccw(c3170.85,3630) J1.4@3213.1,3630 ; 3200.72,3600.13 ccw(c3170.85,3630) J1.4@3213.1,3630 ; 3200.72,3600.13 cw(c3230.6,3570.25) J1.4@3230.6,3612.5 ; 4220,2005 4220,1834.06 JP_COM1.11@4365.98,1688.07 4500,1822.09 ; 4231.63,1822.42 cw(c4097.28,1688.07) 4287.28,1688.07 ccw(c4097.28,1688.07) 4231.63,1822.42 ; 4231.63,1822.42 ccw(c4365.98,1956.77) 4365.98,1766.77 cw(c4365.98,1956.77) 4231.63,1822.42 ; 4265.98,1961.89 cw(c4265.98,1917.79) 4297.16,1948.97 ccw(c4265.98,1917.79) 4265.98,1961.89 ; 4265.98,1961.89 ccw(c4265.98,2005.99) 4297.16,1974.81 cw(c4265.98,2005.99) 4265.98,1961.89 ; 4282.85,1771.21 cw(c4199.71,1688.07) 4317.28,1688.07 ccw(c4199.71,1688.07) 4282.85,1771.21 ; 4282.85,1771.21 ccw(c4365.98,1854.35) 4365.98,1736.77 cw(c4365.98,1854.35) 4282.85,1771.21 ; 4448.91,1771 cw(c4366.28,1853.63) 4366.07,1736.77 ccw(c4366.28,1853.63) 4448.91,1771 ; 4448.91,1771 ccw(c4531.54,1688.37) 4414.68,1688.16 cw(c4531.54,1688.37) 4448.91,1771 ; 4448.91,2589 cw(c4531.54,2671.63) 4414.68,2671.84 ccw(c4531.54,2671.63) 4448.91,2589 ; 4448.91,2589 ccw(c4366.28,2506.37) 4366.07,2623.23 cw(c4366.28,2506.37) 4448.91,2589 ; 4499.99,1822.08 cw(c4366.47,1955.61) 4366.13,1766.77 ccw(c4366.47,1955.61) 4499.99,1822.08 ; 4499.99,1822.08 ccw(c4633.52,1688.55) 4444.69,1688.21 cw(c4633.52,1688.55) 4499.99,1822.08 ; 4500,1822.09 4500,2537.91 ; 4499.99,2537.92 cw(c4633.52,2671.45) 4444.69,2671.79 ccw(c4633.52,2671.45) 4499.99,2537.92 ; 4499.99,2537.92 ccw(c4366.47,2404.39) 4366.13,2593.23 cw(c4366.47,2404.39) 4499.99,2537.92 ; 2571.84,1703.16 cw(c2508.67,1640) 2598,1640 ccw(c2508.67,1640) 2571.84,1703.16 ; 2600.81,1674.19 ccw(c2623,1696.38) 2623,1665 cw(c2623,1696.38) 2600.81,1674.19 ; 4243.49,1981.51 ccw(c4274.3,2012.32) 4299.51,1976.79 cw(c4274.3,2012.32) 4243.49,1981.51 ; 4268.61,1956.39 ccw(c4295.15,1982.93) 4316.87,1952.32 cw(c4295.15,1982.93) 4268.61,1956.39
  Bottom Layer w30: v1(2523.78,2865) 2550.39,2891.61 R14.2@2655,2891.61 C12.1@2915,2891.61 2981.61,2891.61 ; C2.1@2680,3678.39 2738.61,3737 ; C2.1@2680,3689.96 ccw(c2680,3717.91) C2.1@2699.76,3698.15 ; J1.5@2779.92,3711.02 ccw(c2738.62,3691.19) 2738.62,3737 ; J1.5@2779.92,3762.98 cw(c2738.62,3782.81) 2738.62,3737 ; K4.2@2923,1640 3008,1725 3115,1725 3166.61,1776.61 ; v1(3015,3055) 3015,2925 2981.61,2891.61 ; C10.2@3043.39,2345 C9.2@3166.61,2345 3166.61,1776.61 ; v1(3140,2845) 3055,2845 3008.39,2891.61 2981.61,2891.61 ; J1.4@3230.6,3630 J1.6@3337.6,3737 ; J1.6@3352,3737 J1.6@3337.6,3737 ; AT24CXX.1@3784.73,2314.73 cw(c3759.93,2289.93) 3795,2289.93 cw(c3830.07,2289.93) AT24CXX.1@3805.27,2314.73 ; AT24CXX.1@3784.73,2335.27 ccw(c3759.93,2360.07) 3795,2360.07 ccw(c3830.07,2360.07) AT24CXX.1@3805.27,2335.27 ; AT24CXX.2@3784.73,2414.73 cw(c3759.93,2389.93) 3795,2389.93 cw(c3830.07,2389.93) AT24CXX.2@3805.27,2414.73 ; AT24CXX.2@3784.73,2435.27 ccw(c3759.93,2460.07) 3795,2460.07 ccw(c3830.07,2460.07) AT24CXX.2@3805.27,2435.27 ; AT24CXX.3@3784.73,2514.73 cw(c3759.93,2489.93) 3795,2489.93 cw(c3830.07,2489.93) AT24CXX.3@3805.27,2514.73 ; AT24CXX.3@3784.73,2535.27 ccw(c3759.93,2560.07) 3795,2560.07 ccw(c3830.07,2560.07) AT24CXX.3@3805.27,2535.27 ; AT24CXX.4@3784.73,2614.73 cw(c3759.93,2589.93) 3795,2589.93 cw(c3830.07,2589.93) AT24CXX.4@3805.27,2614.73 ; AT24CXX.4@3795,2625 AT24CXX.3@3795,2525 AT24CXX.2@3795,2425 AT24CXX.1@3795,2325 3795,1730 3755,1690 v1(3450,1690) 3253.23,1690 3166.61,1776.61 ; C4.1@3910.65,3148.72 cw(c3946.04,3113.33) 3946.04,3163.39 ; C4.1@3916.88,3127.51 cw(c3897.28,3107.91) 3925,3107.91 ; v1(3925,2945) C3.1@3928.39,2945 3925,2948.39 3925,3133.39 C4.1@3923.39,3135 3951.77,3163.39 C11.2@4285,3163.39 4366.61,3245 4500,3245 ; 3925,2976.37 ccw(c3958.77,2976.37) C3.1@3934.89,2952.49 ; C4.1@3931.86,3127.51 cw(c4018.47,3040.9) 4018.47,3163.39 ; C11.2@4285,3174.96 ccw(c4285,3202.91) C11.2@4304.76,3183.15 ; POW.2@4614,3375 cw(c4575.37,3375) 4602.69,3347.69 cw(c4630,3320.37) POW.2@4630,3359 ; POW.2@4630,3375 4500,3245 ; SW1.3@4631,2960 ccw(c4570.64,2960) 4613.32,3002.68 ccw(c4656,3045.36) SW1.3@4656,2985 ; SW1.3@4656,2960 4580,3036 4580,3165 4500,3245 ; 2738.61,3737 J1.5@2834,3737 J1.6@3337.6,3737 ; J1.5@2876.43,3694.57 cw(c2978.85,3592.15) 2978.85,3737 ; J1.5@2876.43,3694.57 cw(c2978.85,3592.15) 2978.85,3737 ; J1.5@2876.43,3694.57 cw(c2978.85,3592.15) 2978.85,3737 ; J1.5@2876.43,3779.43 ccw(c2978.85,3881.85) 2978.85,3737 ; J1.5@2876.43,3779.43 ccw(c2978.85,3881.85) 2978.85,3737 ; J1.5@2876.43,3779.43 ccw(c2978.85,3881.85) 2978.85,3737 ; 2965.68,1682.68 cw(c2923,1725.36) 2923,1665 ccw(c2923,1725.36) 2965.68,1682.68 ; 2965.68,1682.68 ccw(c3008.36,1640) 2948,1640 cw(c3008.36,1640) 2965.68,1682.68 ; 3207.15,3737 cw(c3207.15,3592.15) J1.6@3309.57,3694.57 ; 3207.15,3737 ccw(c3207.15,3881.85) J1.6@3309.57,3779.43 ; 3207.15,3737 cw(c3207.15,3592.15) J1.6@3309.57,3694.57 ; 3207.15,3737 ccw(c3207.15,3881.85) J1.6@3309.57,3779.43 ; 3207.15,3737 ccw(c3207.15,3881.85) J1.6@3309.57,3779.43 ; 3207.15,3737 cw(c3207.15,3592.15) J1.6@3309.57,3694.57 ; J1.4@3224.99,3624.39 cw(c3352,3497.38) J1.6@3352,3677 ; J1.4@3224.99,3624.39 cw(c3352,3497.38) J1.6@3352,3677 ; J1.4@3224.99,3624.39 cw(c3352,3497.38) J1.6@3352,3677 ; J1.4@3230.6,3647.5 ccw(c3230.6,3689.75) 3260.47,3659.87 ; J1.4@3230.6,3647.5 ccw(c3230.6,3689.75) 3260.47,3659.87 ; J1.4@3230.6,3647.5 ccw(c3230.6,3689.75) 3260.47,3659.87 ; J1.4@3248.1,3630 cw(c3290.35,3630) 3260.47,3659.87 ; J1.4@3248.1,3630 cw(c3290.35,3630) 3260.47,3659.87 ; J1.4@3248.1,3630 cw(c3290.35,3630) 3260.47,3659.87 ; 3259.76,3659.16 ccw(c3181.92,3737) J1.6@3292,3737 ; 3259.76,3659.16 ccw(c3181.92,3737) J1.6@3292,3737 ; 3259.76,3659.16 ccw(c3181.92,3737) J1.6@3292,3737 ; 3276.2,3675.6 cw(c3352,3599.8) J1.6@3352,3707 ; 3276.2,3675.6 cw(c3352,3599.8) J1.6@3352,3707 ; 3276.2,3675.6 cw(c3352,3599.8) J1.6@3352,3707
NetC9_1: C9.1 R7.1 TUSB3210.61 Y1.1 | length 1163.8
  Top Layer w10: TUSB3210.61@3067.52,2666.57 3067.52,2507.48 3130,2445 Y1.1@3185,2445 ; 3149.55,2445 cw(c3149.55,2409.55) Y1.1@3174.62,2434.62 ; 3149.55,2445 ccw(c3149.55,2480.45) Y1.1@3174.62,2455.38 ; 3149.55,2445 cw(c3149.55,2409.55) Y1.1@3174.62,2434.62 ; 3149.55,2445 ccw(c3149.55,2480.45) Y1.1@3174.62,2455.38 ; 3149.55,2445 ccw(c3149.55,2480.45) Y1.1@3174.62,2455.38 ; 3149.55,2445 cw(c3149.55,2409.55) Y1.1@3174.62,2434.62
  Bottom Layer w30: R7.1@3123.39,2545 3123.39,2506.61 Y1.1@3185,2445 3243.39,2386.61 C9.1@3243.39,2345 ; R7.1@3104.99,2546.11 ccw(c3149.52,2543.56) 3117.98,2512.02 ; R7.1@3104.99,2546.11 ccw(c3149.52,2543.56) 3117.98,2512.02 ; R7.1@3104.99,2546.11 ccw(c3149.52,2543.56) 3117.98,2512.02 ; 3123.39,2517.06 cw(c3152.32,2517.06) R7.1@3131.86,2537.51 ; 3123.39,2517.06 cw(c3152.32,2517.06) R7.1@3131.86,2537.51 ; 3123.39,2517.06 cw(c3152.32,2517.06) R7.1@3131.86,2537.51 ; R7.1@3134.94,2544.39 ccw(c3239.04,2538.42) 3165.31,2464.69 ; R7.1@3134.94,2544.39 ccw(c3239.04,2538.42) 3165.31,2464.69 ; R7.1@3134.94,2544.39 ccw(c3239.04,2538.42) 3165.31,2464.69
NetC10_1: C10.1 R7.2 TUSB3210.60 Y1.2 | length 1198.7
  Top Layer w10: Y1.2@2985,2445 3047.83,2507.83 TUSB3210.60@3047.83,2666.57 ; Y1.2@2985,2459.69 ccw(c2985,2495.14) 3010.07,2470.07 ; Y1.2@2985,2459.69 ccw(c2985,2495.14) 3010.07,2470.07 ; Y1.2@2985,2459.69 ccw(c2985,2495.14) 3010.07,2470.07 ; Y1.2@2999.69,2445 cw(c3035.14,2445) 3010.07,2470.07 ; Y1.2@2999.69,2445 cw(c3035.14,2445) 3010.07,2470.07 ; Y1.2@2999.69,2445 cw(c3035.14,2445) 3010.07,2470.07
  Bottom Layer w30: C10.1@2966.61,2345 2966.61,2426.61 Y1.2@2985,2445 3046.61,2506.61 R7.2@3046.61,2545 ; 2966.61,2389.3 cw(c3040.7,2389.3) Y1.2@2988.31,2441.69 ; 2966.61,2389.3 cw(c3040.7,2389.3) Y1.2@2988.31,2441.69 ; 2966.61,2389.3 cw(c3040.7,2389.3) Y1.2@2988.31,2441.69 ; 3004.69,2464.69 ccw(c2930.96,2538.42) R7.2@3035.06,2544.39 ; 3004.69,2464.69 ccw(c2930.96,2538.42) R7.2@3035.06,2544.39 ; 3004.69,2464.69 ccw(c2930.96,2538.42) R7.2@3035.06,2544.39 ; 3052.02,2512.02 ccw(c3020.48,2543.56) R7.2@3065.01,2546.11 ; 3052.02,2512.02 ccw(c3020.48,2543.56) R7.2@3065.01,2546.11 ; 3052.02,2512.02 ccw(c3020.48,2543.56) R7.2@3065.01,2546.11
NetC35_1: C35.1 MAX3232.1 | length 468.4
  Top Layer w20: MAX3232.1@3790,1790 3920,1790 4018.39,1691.61 C35.1@4090,1691.61 C35.1@4083.39,1685 ; 4052.36,1691.61 cw(c4052.36,1653.98) 4078.98,1680.59 ccw(c4052.36,1653.98) 4052.36,1691.61 ; 4052.36,1691.61 ccw(c4052.36,1729.25) 4078.98,1702.64 cw(c4052.36,1729.25) 4052.36,1691.61
NetC35_2: C35.2 MAX3232.3 | length 468.6
  Top Layer w20: MAX3232.3@3790,1890 3925,1890 4046.61,1768.39 C35.2@4090,1768.39 ; 4052.36,1768.39 cw(c4052.36,1730.75) 4078.98,1757.36 ccw(c4052.36,1730.75) 4052.36,1768.39 ; 4052.36,1768.39 ccw(c4052.36,1806.02) 4078.98,1779.41 cw(c4052.36,1806.02) 4052.36,1768.39
NetC37_2: C37.2 MAX3232.2 | length 506.8
  Top Layer w20: C37.2@3648.39,1690 3648.39,1805 3683.39,1840 MAX3232.2@3790,1840 ; 3648.39,1727.64 cw(c3610.75,1727.64) 3637.36,1701.02 ccw(c3610.75,1727.64) 3648.39,1727.64 ; 3648.39,1727.64 ccw(c3686.02,1727.64) 3659.41,1701.02 cw(c3686.02,1727.64) 3648.39,1727.64 ; MAX3232.2@3700,1840 ccw(c3700,1799.89) 3671.64,1828.25 cw(c3700,1799.89) MAX3232.2@3700,1840 ; MAX3232.2@3700,1840 ccw(c3695.85,1810.93) 3675.08,1831.69 cw(c3695.85,1810.93) MAX3232.2@3700,1840
NetC38_1: C38.1 MAX3232.4 | length 438.3
  Top Layer w20: MAX3232.4@3790,1940 3955,1940 4003.39,1891.61 C38.1@4090,1891.61 ; 4052.36,1891.61 cw(c4052.36,1853.98) 4078.98,1880.59 ccw(c4052.36,1853.98) 4052.36,1891.61 ; 4052.36,1891.61 ccw(c4052.36,1929.25) 4078.98,1902.64 cw(c4052.36,1929.25) 4052.36,1891.61
NetC38_2: C38.2 MAX3232.5 | length 427.2
  Top Layer w20: MAX3232.5@3790,1990 3985,1990 4006.61,1968.39 C38.2@4090,1968.39 ; 4052.36,1968.39 cw(c4052.36,1930.75) 4078.98,1957.36 ccw(c4052.36,1930.75) 4052.36,1968.39 ; 4052.36,1968.39 ccw(c4052.36,2006.02) 4078.98,1979.41 cw(c4052.36,2006.02) 4052.36,1968.39
NetC39_2: C39.2 MAX3232.6 | length 346.4
  Top Layer w20: MAX3232.6@3790,2040 3955,2040 3995,2080 C39.2@4001.61,2080 ; 3964.4,2049.4 cw(c4000.63,2013.18) 4000.63,2064.41 ccw(c4000.63,2013.18) 3964.4,2049.4 ; C39.2@3978,2063 ccw(c3960.99,2080) 3985.04,2080 cw(c3960.99,2080) C39.2@3978,2063
NetD0_2: D0.2 R1.2 | length 305.9
  Bottom Layer w30: D0.2@1955,3690 2031.61,3690 R1.2@2041.61,3700 ; 1993.63,3690 cw(c1993.63,3728.63) 1966.31,3701.31 ccw(c1993.63,3728.63) 1993.63,3690 ; 1993.63,3690 ccw(c1993.63,3651.37) 1966.31,3678.69 cw(c1993.63,3651.37) 1993.63,3690 ; 1990.92,3690 ccw(c1990.92,3749.71) 2033.14,3707.49 cw(c1990.92,3749.71) 1990.92,3690
NetD1_2: D1.2 R3.2 | length 305.9
  Bottom Layer w30: D1.2@1955,3470 2031.61,3470 R3.2@2041.61,3480 ; 1993.63,3470 cw(c1993.63,3508.63) 1966.31,3481.31 ccw(c1993.63,3508.63) 1993.63,3470 ; 1993.63,3470 ccw(c1993.63,3431.37) 1966.31,3458.69 cw(c1993.63,3431.37) 1993.63,3470 ; 1990.92,3470 ccw(c1990.92,3529.71) 2033.14,3487.49 cw(c1990.92,3529.71) 1990.92,3470
NetD2_2: D2.2 R4.2 | length 305.9
  Bottom Layer w30: D2.2@1955,3250 2031.61,3250 R4.2@2041.61,3240 ; 1993.63,3250 cw(c1993.63,3288.63) 1966.31,3261.31 ccw(c1993.63,3288.63) 1993.63,3250 ; 1993.63,3250 ccw(c1993.63,3211.37) 1966.31,3238.69 cw(c1993.63,3211.37) 1993.63,3250 ; 1990.92,3250 cw(c1990.92,3190.29) 2033.14,3232.51 ccw(c1990.92,3190.29) 1990.92,3250
NetD3_2: D3.2 R5.2 | length 305.9
  Bottom Layer w30: D3.2@1955,3030 2031.61,3030 R5.2@2041.61,3040 ; 1993.63,3030 cw(c1993.63,3068.63) 1966.31,3041.31 ccw(c1993.63,3068.63) 1993.63,3030 ; 1993.63,3030 ccw(c1993.63,2991.37) 1966.31,3018.69 cw(c1993.63,2991.37) 1993.63,3030 ; 1990.92,3030 ccw(c1990.92,3089.71) 2033.14,3047.49 cw(c1990.92,3089.71) 1990.92,3030
NetD4_2: D4.2 R6.2 | length 305.9
  Bottom Layer w30: D4.2@1955,2810 2031.61,2810 R6.2@2041.61,2800 ; 1993.63,2810 cw(c1993.63,2848.63) 1966.31,2821.31 ccw(c1993.63,2848.63) 1993.63,2810 ; 1993.63,2810 ccw(c1993.63,2771.37) 1966.31,2798.69 cw(c1993.63,2771.37) 1993.63,2810 ; 1990.92,2810 cw(c1990.92,2750.29) 2033.14,2792.51 ccw(c1990.92,2750.29) 1990.92,2810
NetD5_2: D5.2 R20.2 | length 305.9
  Bottom Layer w30: D5.2@1955,2590 2031.61,2590 R20.2@2041.61,2580 ; 1993.63,2590 cw(c1993.63,2628.63) 1966.31,2601.31 ccw(c1993.63,2628.63) 1993.63,2590 ; 1993.63,2590 ccw(c1993.63,2551.37) 1966.31,2578.69 cw(c1993.63,2551.37) 1993.63,2590 ; 1990.92,2590 cw(c1990.92,2530.29) 2033.14,2572.51 ccw(c1990.92,2530.29) 1990.92,2590
NetD6_2: D6.2 R21.2 | length 305.9
  Bottom Layer w30: D6.2@1955,2370 2031.61,2370 R21.2@2041.61,2360 ; 1993.63,2370 cw(c1993.63,2408.63) 1966.31,2381.31 ccw(c1993.63,2408.63) 1993.63,2370 ; 1993.63,2370 ccw(c1993.63,2331.37) 1966.31,2358.69 cw(c1993.63,2331.37) 1993.63,2370 ; 1990.92,2370 cw(c1990.92,2310.29) 2033.14,2352.51 ccw(c1990.92,2310.29) 1990.92,2370
NetD7_2: D7.2 R22.2 | length 305.9
  Bottom Layer w30: D7.2@1955,2150 2031.61,2150 R22.2@2041.61,2140 ; 1993.63,2150 cw(c1993.63,2188.63) 1966.31,2161.31 ccw(c1993.63,2188.63) 1993.63,2150 ; 1993.63,2150 ccw(c1993.63,2111.37) 1966.31,2138.69 cw(c1993.63,2111.37) 1993.63,2150 ; 1990.92,2150 cw(c1990.92,2090.29) 2033.14,2132.51 ccw(c1990.92,2090.29) 1990.92,2150
NetJ1_2: J1.2 R8.1 | length 348.4
  Bottom Layer w30: R8.1@3035,3488.39 3035,3550 3053.5,3568.5 J1.2@3053.5,3630 ; J1.2@3041.13,3617.63 cw(c3011.25,3587.75) 3053.5,3587.75 ; J1.2@3041.13,3617.63 cw(c3011.25,3587.75) 3053.5,3587.75 ; J1.2@3041.13,3617.63 cw(c3011.25,3587.75) 3053.5,3587.75 ; 3053.5,3587.75 cw(c3095.75,3587.75) J1.2@3065.87,3617.63 ; 3053.5,3587.75 cw(c3095.75,3587.75) J1.2@3065.87,3617.63 ; 3053.5,3587.75 cw(c3095.75,3587.75) J1.2@3065.87,3617.63
NetJ1_3: J1.3 R9.1 R12.2 | length 470.2
  Bottom Layer w30: J1.3@3132,3630 3132,3558 3155,3535 R9.1@3155,3488.39 R12.2@3275,3488.39 ; J1.3@3119.63,3617.63 cw(c3089.75,3587.75) 3132,3587.75 ; J1.3@3119.63,3617.63 cw(c3089.75,3587.75) 3132,3587.75 ; J1.3@3119.63,3617.63 cw(c3089.75,3587.75) 3132,3587.75 ; 3132,3587.75 cw(c3174.25,3587.75) J1.3@3144.37,3617.63 ; 3132,3587.75 cw(c3174.25,3587.75) J1.3@3144.37,3617.63 ; 3132,3587.75 cw(c3174.25,3587.75) J1.3@3144.37,3617.63
NetJP_COM1_2: JP_COM1.2 MAX3232.7 | length 1088.8
  Top Layer w20: MAX3232.7@3790,2090 3660,2090 3660,2175 3695,2210 4231.02,2210 JP_COM1.2@4310.08,2289.06 ; 4270.36,2249.33 cw(c4310.08,2209.61) 4310.08,2265.79 ccw(c4310.08,2209.61) 4270.36,2249.33 ; 4270.36,2249.33 ccw(c4230.64,2289.06) 4286.81,2289.06 cw(c4230.64,2289.06) 4270.36,2249.33
NetJP_COM1_3: JP_COM1.3 MAX3232.8 | length 713.1
  Top Layer w20: MAX3232.8@3790,2140 4270.08,2140 JP_COM1.3@4310.08,2180 ; 4270.36,2140.28 cw(c4310.08,2100.56) 4310.08,2156.73 ccw(c4310.08,2100.56) 4270.36,2140.28 ; 4270.36,2140.28 ccw(c4230.64,2180) 4286.81,2180 cw(c4230.64,2180) 4270.36,2140.28
NetPOW_1: POW.1 R2.2 | length 305
  Bottom Layer w30: R2.2@4470,3453.39 4491.61,3475 POW.1@4630,3475 ; R2.2@4477.49,3446.88 cw(c4545.37,3379) 4545.37,3475 ; POW.1@4618.69,3463.69 ccw(c4591.37,3436.37) 4591.37,3475 ccw(c4591.37,3513.63) POW.1@4618.69,3486.31
NetQ1_1: Q1.1 R12.1 | length 342.6
  Bottom Layer w20: R12.1@3275,3411.61 3311.61,3411.61 ; R12.1@3286.24,3400.81 cw(c3311.61,3376.42) 3311.61,3411.61 ; R12.1@3286.24,3422.42 ccw(c3311.61,3446.81) 3311.61,3411.61 ; Q1.1@3473.47,3463.15 ccw(c3456.93,3446.62) 3456.93,3470 ccw(c3456.93,3493.38) Q1.1@3473.47,3476.85 ; Q1.1@3500,3470 3370,3470 3311.61,3411.61
NetQ1_2: Q1.2 R13.1 | length 809.9
  Bottom Layer w20: R13.1@2915,3395.04 cw(c2915,3355.02) 2943.3,3383.32 ; R13.1@2915,3411.61 3066.61,3260 3265,3260 3425,3420 Q1.2@3500,3420 ; R13.1@2930.59,3410.63 ccw(c2965.85,3410.63) 2940.92,3385.7 ; Q1.2@3473.47,3413.15 ccw(c3456.93,3396.62) 3456.93,3420 ccw(c3456.93,3443.38) Q1.2@3473.47,3426.85
NetQ1_3: Q1.3 TUSB3210.17 | length 746.2
  Top Layer w10: TUSB3210.17@3126.57,3158.7 3337.87,3370 Q1.3@3500,3370 ; TUSB3210.17@3126.57,3162.91 ccw(c3126.57,3173.08) 3133.77,3165.89 ; TUSB3210.17@3126.57,3172.91 ccw(c3126.57,3207.23) 3150.84,3182.96 ; TUSB3210.17@3126.57,3182.91 ccw(c3126.57,3241.37) 3167.91,3200.03 ; TUSB3210.17@3126.57,3192.91 ccw(c3126.57,3275.51) 3184.98,3217.1 ; TUSB3210.17@3126.57,3202.91 ccw(c3126.57,3309.65) 3202.05,3234.18 ; Q1.3@3469.93,3359.62 ccw(c3444.86,3334.55) 3444.86,3370 ccw(c3444.86,3405.45) Q1.3@3469.93,3380.38
NetR8_2: R8.2 TP1.1 TUSB3210.19 | length 538.1
  Top Layer w10: TUSB3210.19@3087.2,3158.7 3087.2,3292.2 3100,3305 TP1.1@3100,3360 ; TP1.1@3092.93,3352.93 cw(c3075.86,3335.86) 3100,3335.86 ; TP1.1@3092.93,3352.93 cw(c3075.86,3335.86) 3100,3335.86 ; TP1.1@3092.93,3352.93 cw(c3075.86,3335.86) 3100,3335.86 ; 3100,3335.86 cw(c3124.14,3335.86) TP1.1@3107.07,3352.93 ; 3100,3335.86 cw(c3124.14,3335.86) TP1.1@3107.07,3352.93 ; 3100,3335.86 cw(c3124.14,3335.86) TP1.1@3107.07,3352.93
  Bottom Layer w30: R8.2@3035,3411.61 3048.39,3411.61 TP1.1@3092.5,3367.5 ; R8.2@3035,3400.04 cw(c3035,3339.78) 3077.61,3382.39 ; R8.2@3035,3400.04 cw(c3035,3339.78) 3077.61,3382.39 ; R8.2@3035,3400.04 cw(c3035,3339.78) 3077.61,3382.39
NetR9_2: R9.2 TP2.1 TUSB3210.18 | length 396.6
  Top Layer w10: TUSB3210.18@3106.89,3158.7 3106.89,3271.89 3140,3305 TP2.1@3140,3300 ; 3114.39,3279.39 cw(c3140,3253.79) TP2.1@3140,3290 ; 3114.39,3279.39 cw(c3140,3253.79) TP2.1@3140,3290 ; 3114.39,3279.39 cw(c3140,3253.79) TP2.1@3140,3290 ; 3126.46,3291.46 ccw(c3117.93,3300) TP2.1@3130,3300 ; 3126.46,3291.46 ccw(c3117.93,3300) TP2.1@3130,3300 ; 3126.46,3291.46 ccw(c3117.93,3300) TP2.1@3130,3300
  Bottom Layer w30: TP2.1@3140,3300 3140,3355 3155,3370 R9.2@3155,3411.61
NetR11_1: R11.1 SW1.2 | length 252.7
  Bottom Layer w30: SW1.2@4400,3137 4481.39,3137 R11.1@4520,3098.39 ; SW1.2@4417.68,3119.32 cw(c4460.36,3076.64) 4460.36,3137 cw(c4460.36,3197.36) SW1.2@4417.68,3154.68 ; R11.1@4500.24,3118.15 ccw(c4520,3137.91) R11.1@4520,3109.96
NetR15_2: R15.2 SUSP.1 | length 325
  Bottom Layer w30: SUSP.1@4170,3475 4328.39,3475 R15.2@4350,3453.39 ; SUSP.1@4181.31,3463.69 cw(c4208.63,3436.37) 4208.63,3475 cw(c4208.63,3513.63) SUSP.1@4181.31,3486.31 ; 4274.63,3475 cw(c4274.63,3379) R15.2@4342.51,3446.88
NetR16_2: R16.2 TUSB3210.8 | length 296
  Top Layer w10: TUSB3210.8@3225,2902.8 3387.2,2902.8 v1(3455,2835) ; v1@3445,2835 ccw(c3420.86,2835) 3437.93,2852.07 ccw(c3455,2869.14) v1@3455,2845
NetR17_2: R17.2 TUSB3210.9 | length 288.5
  Top Layer w10: TUSB3210.9@3225,2922.48 3422.48,2922.48 v1(3460,2960) ; v1@3450,2960 cw(c3425.86,2960) 3442.93,2942.93 cw(c3460,2925.86) v1@3460,2950
P0_0: P0.0---->P3.0.1 R1.1 TUSB3210.43 | length 3186.5
  Top Layer w10: P0.0---->P3.0.1@2220,2040 2175,2085 2175,2470 2568.43,2863.43 TUSB3210.43@2732.87,2863.43 ; 2178.13,2081.87 cw(c2136.26,2040) P0.0---->P3.0.1@2195.47,2040 ; 2178.13,2081.87 ccw(c2220,2123.74) P0.0---->P3.0.1@2220,2064.53 ; 2178.13,2081.87 cw(c2136.26,2040) P0.0---->P3.0.1@2195.47,2040 ; 2178.13,2081.87 ccw(c2220,2123.74) P0.0---->P3.0.1@2220,2064.53 ; 2178.13,2081.87 ccw(c2220,2123.74) P0.0---->P3.0.1@2220,2064.53 ; 2178.13,2081.87 cw(c2136.26,2040) P0.0---->P3.0.1@2195.47,2040 ; P0.0---->P3.0.1@2195.2,2064.8 cw(c2170.4,2040) P0.0---->P3.0.1@2205.47,2040 ; P0.0---->P3.0.1@2195.2,2064.8 ccw(c2220,2089.6) P0.0---->P3.0.1@2220,2054.53 ; P0.0---->P3.0.1@2195.2,2064.8 cw(c2170.4,2040) P0.0---->P3.0.1@2205.47,2040 ; P0.0---->P3.0.1@2195.2,2064.8 ccw(c2220,2089.6) P0.0---->P3.0.1@2220,2054.53 ; P0.0---->P3.0.1@2195.2,2064.8 ccw(c2220,2089.6) P0.0---->P3.0.1@2220,2054.53 ; P0.0---->P3.0.1@2195.2,2064.8 cw(c2170.4,2040) P0.0---->P3.0.1@2205.47,2040 ; 2487.93,2782.93 cw(c2505,2765.86) 2505,2790 ccw(c2505,2765.86) 2487.93,2782.93 ; 2487.93,2782.93 ccw(c2470.86,2800) 2495,2800 cw(c2470.86,2800) 2487.93,2782.93 ; 2522.07,2817.07 cw(c2505,2834.14) 2505,2810 ccw(c2505,2834.14) 2522.07,2817.07 ; 2522.07,2817.07 ccw(c2539.14,2800) 2515,2800 cw(c2539.14,2800) 2522.07,2817.07
  Bottom Layer w10: R1.1@2118.39,3700 2275,3543.39 2275,2885 2360,2800 v1(2505,2800) ; 2480.86,2800 cw(c2480.86,2775.86) 2497.93,2792.93 ccw(c2480.86,2775.86) 2480.86,2800 ; 2480.86,2800 ccw(c2480.86,2824.14) 2497.93,2807.07 cw(c2480.86,2824.14) 2480.86,2800 ; R1.1@2119.37,3679.41 cw(c2119.37,3632.08) 2152.84,3665.55 ccw(c2119.37,3632.08) R1.1@2119.37,3679.41 ; R1.1@2129.96,3700 ccw(c2157.91,3700) 2138.15,3680.24 cw(c2157.91,3700) R1.1@2129.96,3700 ; R1.1@2139.96,3700 ccw(c2192.05,3700) 2155.22,3663.17 cw(c2192.05,3700) R1.1@2139.96,3700
P0_1: P0.0---->P3.0.2 R3.1 TUSB3210.44 | length 2870
  Top Layer w10: P0.0---->P3.0.2@2220,2140 2220,2475 2520,2775 2520.36,2775 2535,2789.64 2535,2790 2588.74,2843.74 TUSB3210.44@2732.87,2843.74 ; P0.0---->P3.0.2@2202.66,2157.34 ccw(c2160.79,2199.21) 2220,2199.21 ; P0.0---->P3.0.2@2202.66,2157.34 ccw(c2160.79,2199.21) 2220,2199.21 ; P0.0---->P3.0.2@2202.66,2157.34 ccw(c2160.79,2199.21) 2220,2199.21 ; P0.0---->P3.0.2@2209.73,2150.27 ccw(c2184.93,2175.07) 2220,2175.07 ; P0.0---->P3.0.2@2209.73,2150.27 ccw(c2184.93,2175.07) 2220,2175.07 ; P0.0---->P3.0.2@2209.73,2150.27 ccw(c2184.93,2175.07) 2220,2175.07 ; 2220,2175.07 ccw(c2255.07,2175.07) P0.0---->P3.0.2@2230.27,2150.27 ; 2220,2175.07 ccw(c2255.07,2175.07) P0.0---->P3.0.2@2230.27,2150.27 ; 2220,2175.07 ccw(c2255.07,2175.07) P0.0---->P3.0.2@2230.27,2150.27 ; 2220,2199.21 ccw(c2279.21,2199.21) P0.0---->P3.0.2@2237.34,2157.34 ; 2220,2199.21 ccw(c2279.21,2199.21) P0.0---->P3.0.2@2237.34,2157.34 ; 2220,2199.21 ccw(c2279.21,2199.21) P0.0---->P3.0.2@2237.34,2157.34 ; 2482.93,2737.93 cw(c2500,2720.86) 2500,2745 ccw(c2500,2720.86) 2482.93,2737.93 ; 2482.93,2737.93 ccw(c2465.86,2755) 2490,2755 cw(c2465.86,2755) 2482.93,2737.93 ; 2517.07,2772.07 cw(c2500,2789.14) 2500,2765 ccw(c2500,2789.14) 2517.07,2772.07 ; 2517.07,2772.07 ccw(c2534.14,2755) 2510,2755 cw(c2534.14,2755) 2517.07,2772.07
  Bottom Layer w10: R3.1@2118.39,3480 2245,3353.39 2245,2815 2305,2755 v1(2500,2755) ; 2475.86,2755 cw(c2475.86,2730.86) 2492.93,2747.93 ccw(c2475.86,2730.86) 2475.86,2755 ; 2475.86,2755 ccw(c2475.86,2779.14) 2492.93,2762.07 cw(c2475.86,2779.14) 2475.86,2755 ; R3.1@2119.37,3459.41 cw(c2119.37,3412.08) 2152.84,3445.55 ccw(c2119.37,3412.08) R3.1@2119.37,3459.41 ; R3.1@2129.96,3480 ccw(c2157.91,3480) 2138.15,3460.24 cw(c2157.91,3480) R3.1@2129.96,3480 ; R3.1@2139.96,3480 ccw(c2192.05,3480) 2155.22,3443.17 cw(c2192.05,3480) R3.1@2139.96,3480
P0_2: P0.0---->P3.0.3 R4.1 TUSB3210.45 | length 2733
  Top Layer w10: P0.0---->P3.0.3@2320,2040 2270,2090 2270,2485 2609.05,2824.05 TUSB3210.45@2732.87,2824.05 ; 2278.13,2081.87 cw(c2236.26,2040) P0.0---->P3.0.3@2295.47,2040 ; 2278.13,2081.87 ccw(c2320,2123.74) P0.0---->P3.0.3@2320,2064.53 ; 2278.13,2081.87 cw(c2236.26,2040) P0.0---->P3.0.3@2295.47,2040 ; 2278.13,2081.87 ccw(c2320,2123.74) P0.0---->P3.0.3@2320,2064.53 ; 2278.13,2081.87 ccw(c2320,2123.74) P0.0---->P3.0.3@2320,2064.53 ; 2278.13,2081.87 cw(c2236.26,2040) P0.0---->P3.0.3@2295.47,2040 ; 2295.2,2064.8 cw(c2270.4,2040) P0.0---->P3.0.3@2305.47,2040 ; 2295.2,2064.8 ccw(c2320,2089.6) P0.0---->P3.0.3@2320,2054.53 ; 2295.2,2064.8 cw(c2270.4,2040) P0.0---->P3.0.3@2305.47,2040 ; 2295.2,2064.8 ccw(c2320,2089.6) P0.0---->P3.0.3@2320,2054.53 ; 2295.2,2064.8 ccw(c2320,2089.6) P0.0---->P3.0.3@2320,2054.53 ; 2295.2,2064.8 cw(c2270.4,2040) P0.0---->P3.0.3@2305.47,2040 ; 2477.93,2692.93 cw(c2495,2675.86) 2495,2700 ccw(c2495,2675.86) 2477.93,2692.93 ; 2477.93,2692.93 ccw(c2460.86,2710) 2485,2710 cw(c2460.86,2710) 2477.93,2692.93 ; 2512.07,2727.07 cw(c2495,2744.14) 2495,2720 ccw(c2495,2744.14) 2512.07,2727.07 ; 2512.07,2727.07 ccw(c2529.14,2710) 2505,2710 cw(c2529.14,2710) 2512.07,2727.07
  Bottom Layer w10: R4.1@2118.39,3240 2220,3138.39 2220,2785 2290,2715 2490,2715 v1(2495,2710) ; R4.1@2119.37,3219.41 cw(c2119.37,3172.08) 2152.84,3205.55 ccw(c2119.37,3172.08) R4.1@2119.37,3219.41 ; R4.1@2129.96,3240 ccw(c2157.91,3240) 2138.15,3220.24 cw(c2157.91,3240) R4.1@2129.96,3240 ; R4.1@2139.96,3240 ccw(c2192.05,3240) 2155.22,3203.17 cw(c2192.05,3240) R4.1@2139.96,3240 ; 2458.79,2715 cw(c2458.79,2673.79) 2487.93,2702.93 ccw(c2458.79,2673.79) 2458.79,2715
P0_3: P0.0---->P3.0.4 R5.1 TUSB3210.46 | length 2414
  Top Layer w10: P0.0---->P3.0.4@2320,2140 2320,2495 2629.37,2804.37 TUSB3210.46@2732.87,2804.37 ; P0.0---->P3.0.4@2302.66,2157.34 ccw(c2260.79,2199.21) 2320,2199.21 ; P0.0---->P3.0.4@2302.66,2157.34 ccw(c2260.79,2199.21) 2320,2199.21 ; P0.0---->P3.0.4@2302.66,2157.34 ccw(c2260.79,2199.21) 2320,2199.21 ; P0.0---->P3.0.4@2309.73,2150.27 ccw(c2284.93,2175.07) 2320,2175.07 ; P0.0---->P3.0.4@2309.73,2150.27 ccw(c2284.93,2175.07) 2320,2175.07 ; P0.0---->P3.0.4@2309.73,2150.27 ccw(c2284.93,2175.07) 2320,2175.07 ; 2320,2175.07 ccw(c2355.07,2175.07) P0.0---->P3.0.4@2330.27,2150.27 ; 2320,2175.07 ccw(c2355.07,2175.07) P0.0---->P3.0.4@2330.27,2150.27 ; 2320,2175.07 ccw(c2355.07,2175.07) P0.0---->P3.0.4@2330.27,2150.27 ; 2320,2199.21 ccw(c2379.21,2199.21) P0.0---->P3.0.4@2337.34,2157.34 ; 2320,2199.21 ccw(c2379.21,2199.21) P0.0---->P3.0.4@2337.34,2157.34 ; 2320,2199.21 ccw(c2379.21,2199.21) P0.0---->P3.0.4@2337.34,2157.34 ; 2472.93,2647.93 cw(c2490,2630.86) 2490,2655 ccw(c2490,2630.86) 2472.93,2647.93 ; 2472.93,2647.93 ccw(c2455.86,2665) 2480,2665 cw(c2455.86,2665) 2472.93,2647.93 ; 2507.07,2682.07 cw(c2490,2699.14) 2490,2675 ccw(c2490,2699.14) 2507.07,2682.07 ; 2507.07,2682.07 ccw(c2524.14,2665) 2500,2665 cw(c2524.14,2665) 2507.07,2682.07
  Bottom Layer w10: R5.1@2118.39,3040 2200,2958.39 2200,2755 2290,2665 v1(2490,2665) ; 2465.86,2665 cw(c2465.86,2640.86) 2482.93,2657.93 ccw(c2465.86,2640.86) 2465.86,2665 ; 2465.86,2665 ccw(c2465.86,2689.14) 2482.93,2672.07 cw(c2465.86,2689.14) 2465.86,2665 ; R5.1@2119.37,3019.41 cw(c2119.37,2972.08) 2152.84,3005.55 ccw(c2119.37,2972.08) R5.1@2119.37,3019.41 ; R5.1@2129.96,3040 ccw(c2157.91,3040) 2138.15,3020.24 cw(c2157.91,3040) R5.1@2129.96,3040 ; R5.1@2139.96,3040 ccw(c2192.05,3040) 2155.22,3003.17 cw(c2192.05,3040) R5.1@2139.96,3040